# EAGLE board tutorial3 (EAGLE 9.6.2)
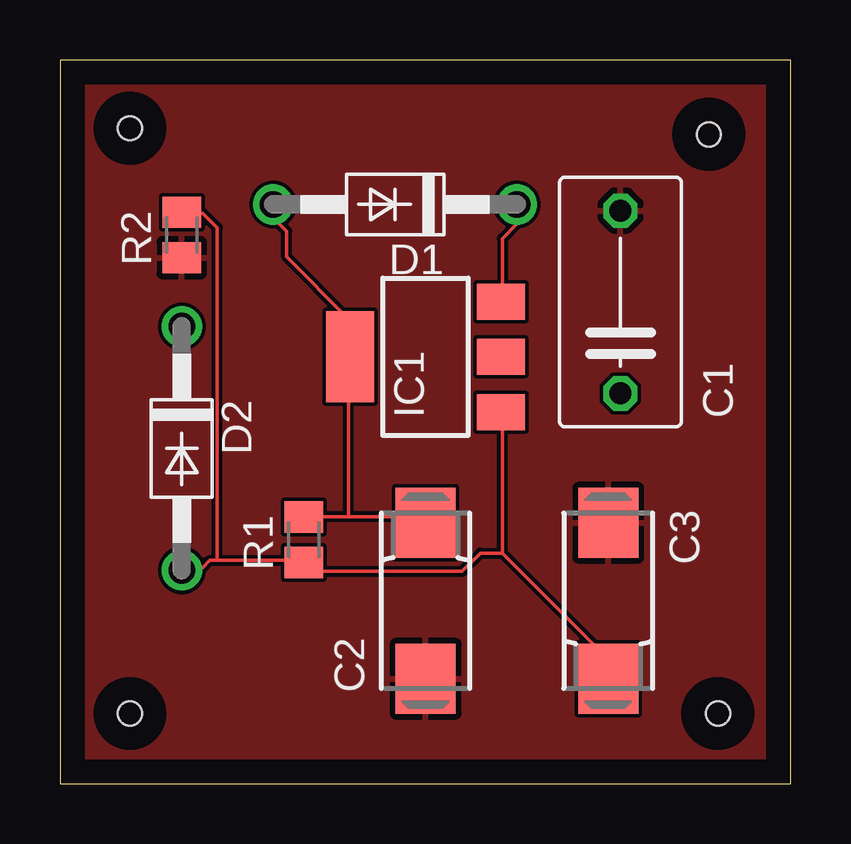
[diagram p0: board, top side]
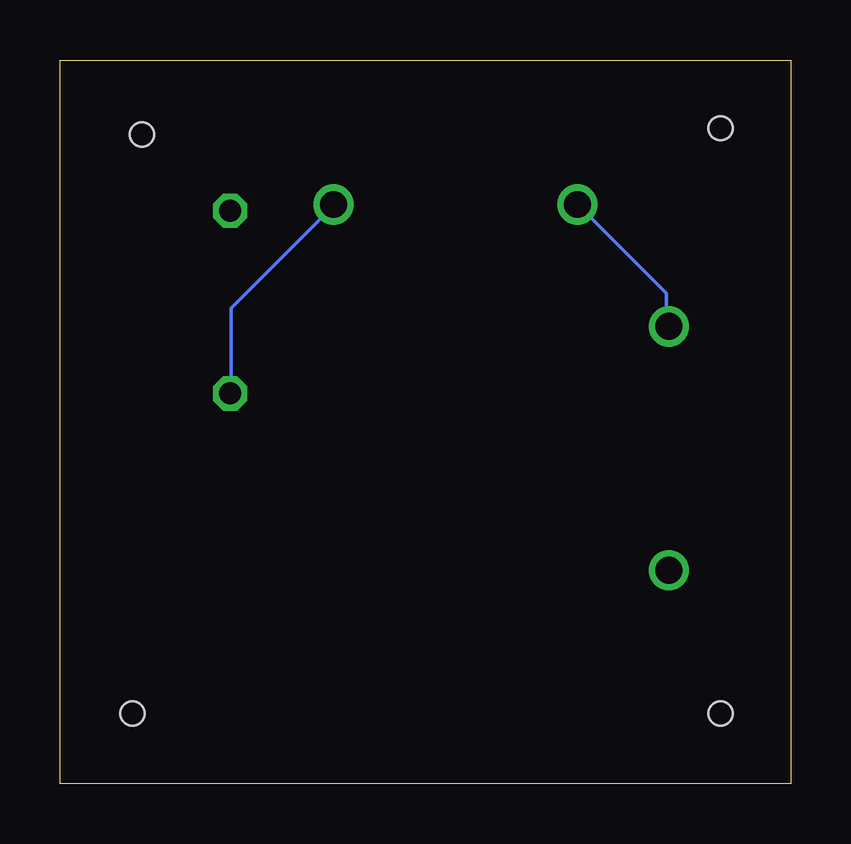
[diagram p1: board, bottom side, seen from below]

Size 30.46 x 30.15 mm. Coordinates in mm from the lower left corner, seen from the top.
Outline: 0,0 30.46,0 30.46,30.15 0,30.15 0,0
Copper layers (1*16): Top 0.035mm / dielectric 1.5mm / Bottom 0.035mm
Design rules "default": minimum track width 6mil, minimum drill 0.35mm, track to track 6mil, track to pad 6mil, pad to pad 6mil, via to via 6mil, smd to smd 6mil, copper to edge 40mil, drill to drill 6mil, minimum pad ring 10mil, minimum via ring 8mil, stop-mask expansion 4mil, vias tented up to drill 0mil, thermal gap 10mil
Holes 1 mm at 2.92,27.3 27.05,27.05 2.92,2.92 27.43,2.92

## Footprints (pad centres in the part's own frame; a part is rotated, then mirrored left to right if it is on the bottom)
C075-052X106 = drill 0.914 octagon: 1 -3.81,0; 2 3.81,0
085CS_1AR = smd 2.9 x 2.5: + 3.25,0; - -3.25,0
DO41-10 = drill 1.118: A 5.08,0; C -5.08,0
SOT223 = smd 1.5 x 2: 1 -2.3,-3.15; 2 0,-3.15; 3 2.3,-3.15 | smd 3.8 x 2: 4 0,3.15
M0805 = smd 1.3 x 1.6: 1 -0.95,0; 2 0.95,0

## Placement (x,y rotation side)
C1  0.1uF  [C075-052X106]  23.37,20.07 90 top
C2  1uF  [085CS_1AR]  15.24,7.62 90 top
C3  10uF  [085CS_1AR]  22.86,7.62 270 top
D1  1N4002  [DO41-10]  13.97,24.13 180 top
D2  1N4002  [DO41-10]  5.08,13.97 270 top
IC1  LM317MBSTT3  [SOT223]  15.24,17.78 90 top
R1  240Ω  [M0805]  10.16,10.16 90 top
R2  720Ω  [M0805]  5.08,22.86 90 top

## Library data of the parts
C1 = rcl
C2 C3 R1 R2 = resistor
D1 D2 = diode
IC1 = v-reg; PARTNUMBER: LM317M

## Nets
GND: C1.2 C2.- C3.- R2.1
N$1: C3.+ D2.A IC1.1 R1.1 R2.2
VIN: C1.1 D1.C IC1.3
VO: C2.+ D1.A D2.C IC1.4 R1.2

## Tracks (layer width: path | path; a pad name or v marks a point on that pad's centre or on a via)
GND
  pour Top: 0.13,30.1 0.13,0 30.48,0 30.48,30.1
N$1
  Top 0.152: 18.44,9.6 18.44,15.39 IC1.1 | 18.44,9.6 22.86,5.18 C3.+ | 6.55,9.3 6.25,9.3 5.94,8.99 5.18,8.99 D2.A | 6.55,9.3 10.06,9.3 R1.1 10.21,9.14 10.52,8.84 16.76,8.84 17.53,9.6 18.44,9.6 | 6.55,9.3 6.55,23.16 5.94,23.77 5.18,23.77 R2.2
VIN
  Top 0.152: D1.C 19.05,23.32 18.44,22.71 18.44,20.12 IC1.3
  Bottom 0.152: C1.1 23.32,16.31 23.32,19.81 19.05,24.08 D1.C
VO
  Top 0.152: 12.04,11.12 15.09,11.12 15.24,10.97 C2.+ | 12.04,11.12 10.21,11.12 R1.2 | 12.04,11.12 12.04,17.68 IC1.4 12.04,17.83 12.04,19.36 9.45,21.95 9.45,23.01 8.99,23.47 8.99,24.08 D1.A
  Bottom 0.152: D1.A 5.18,20.42 5.18,19.05 D2.C